# EAGLE board FlipDot_Controller (EAGLE 8.4.1)
FlipDot Controller Version 0.1 Prototype
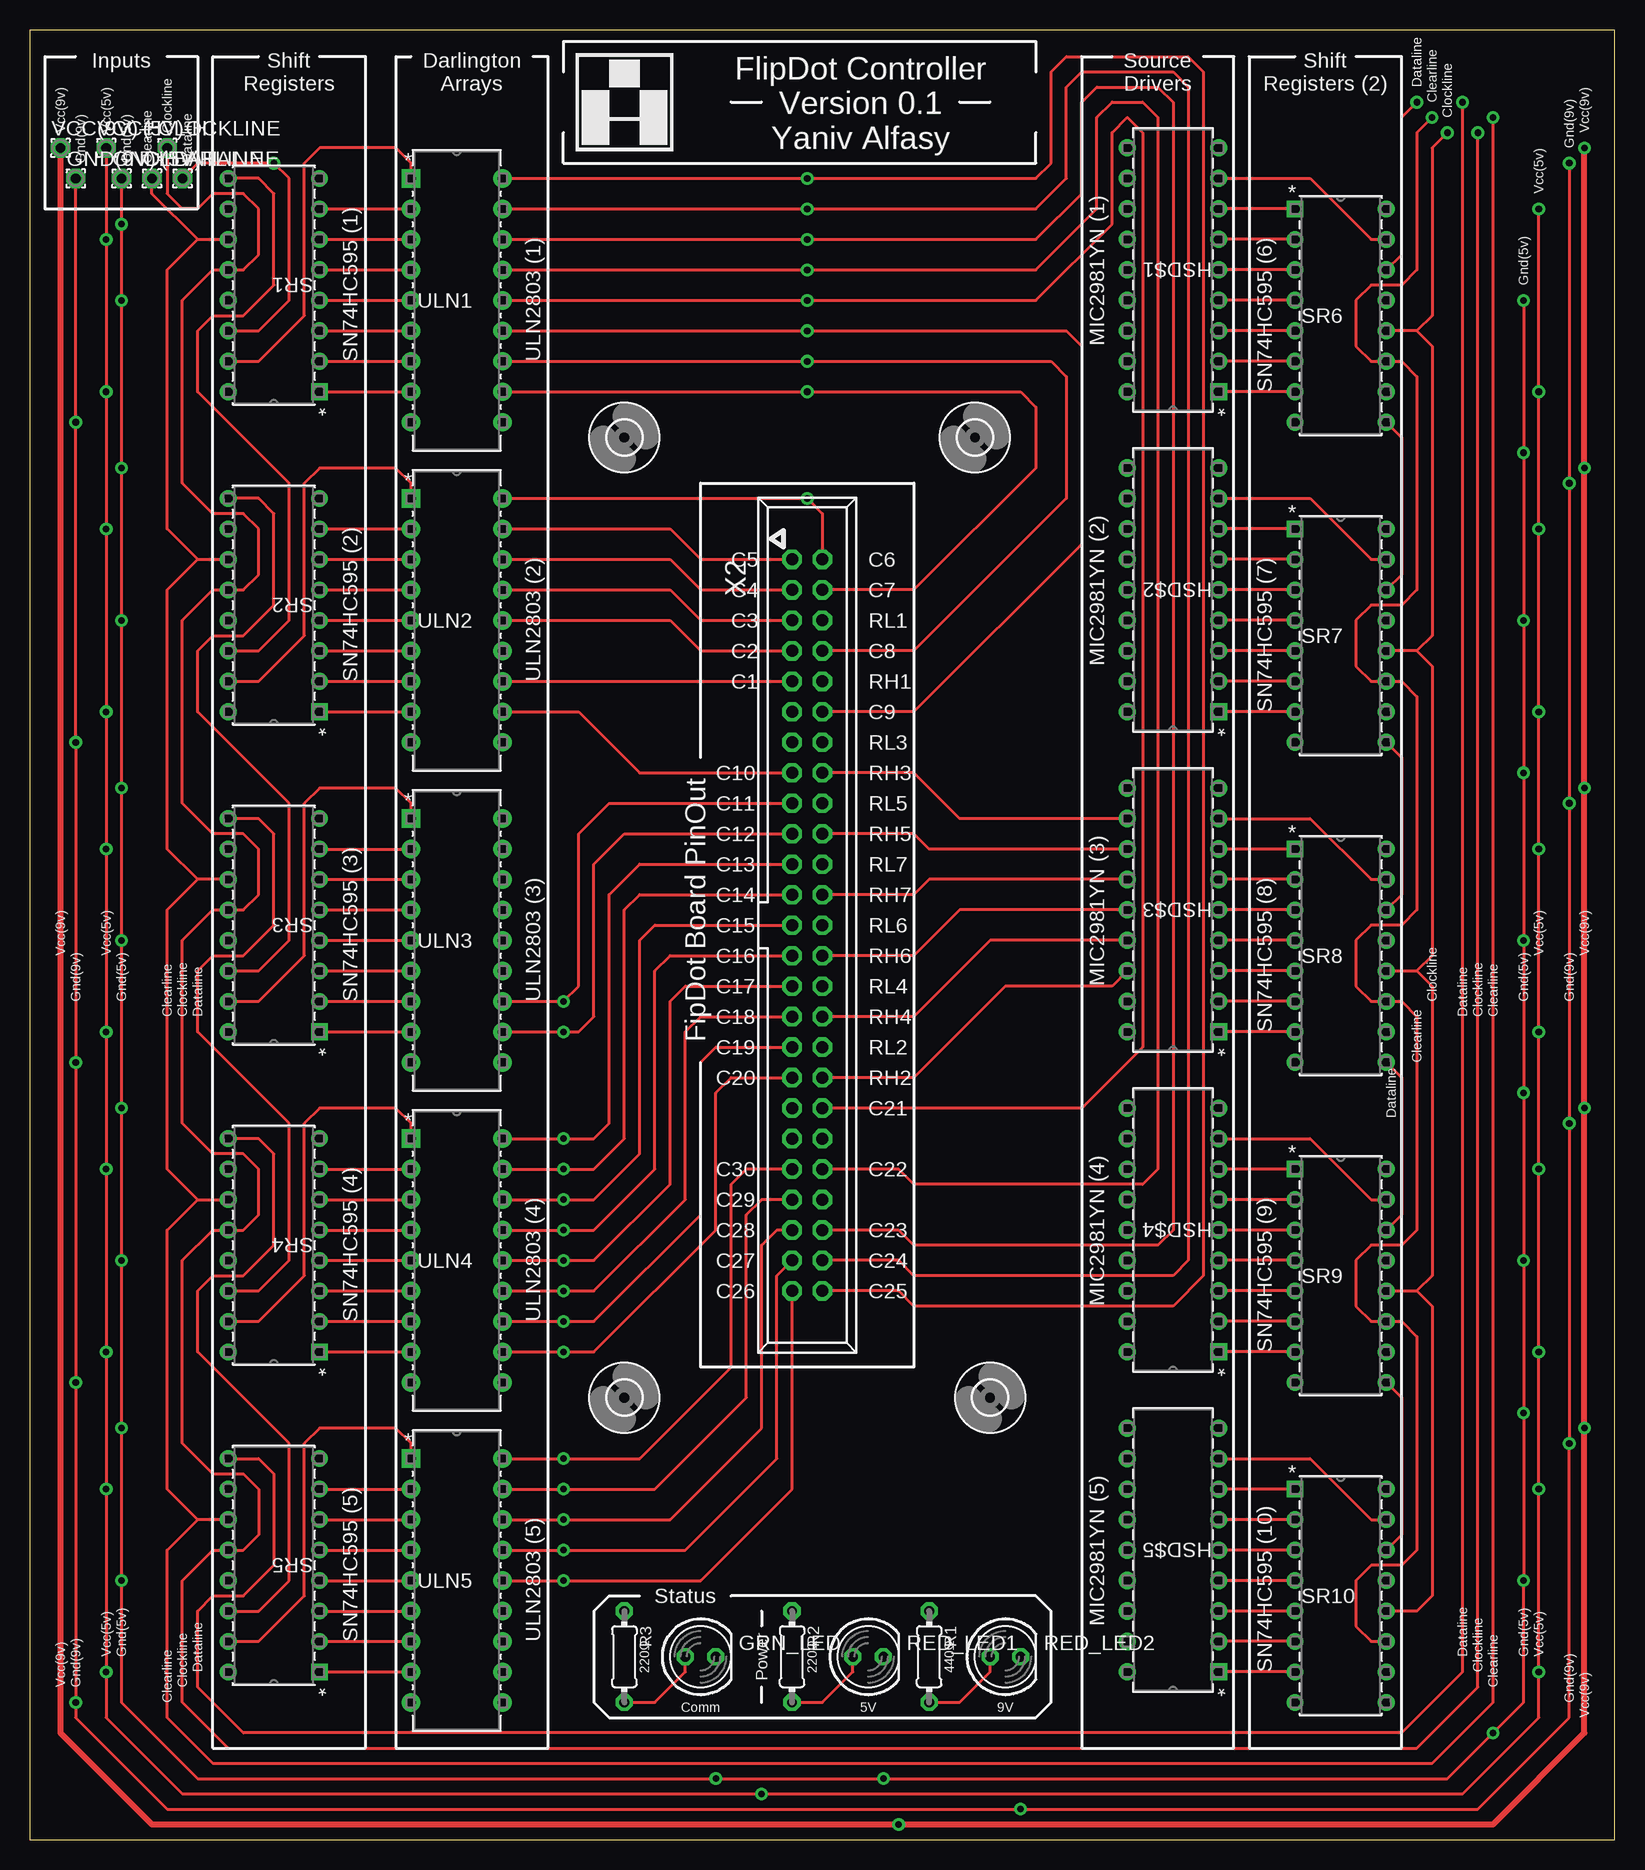
[diagram p0: board, top side]
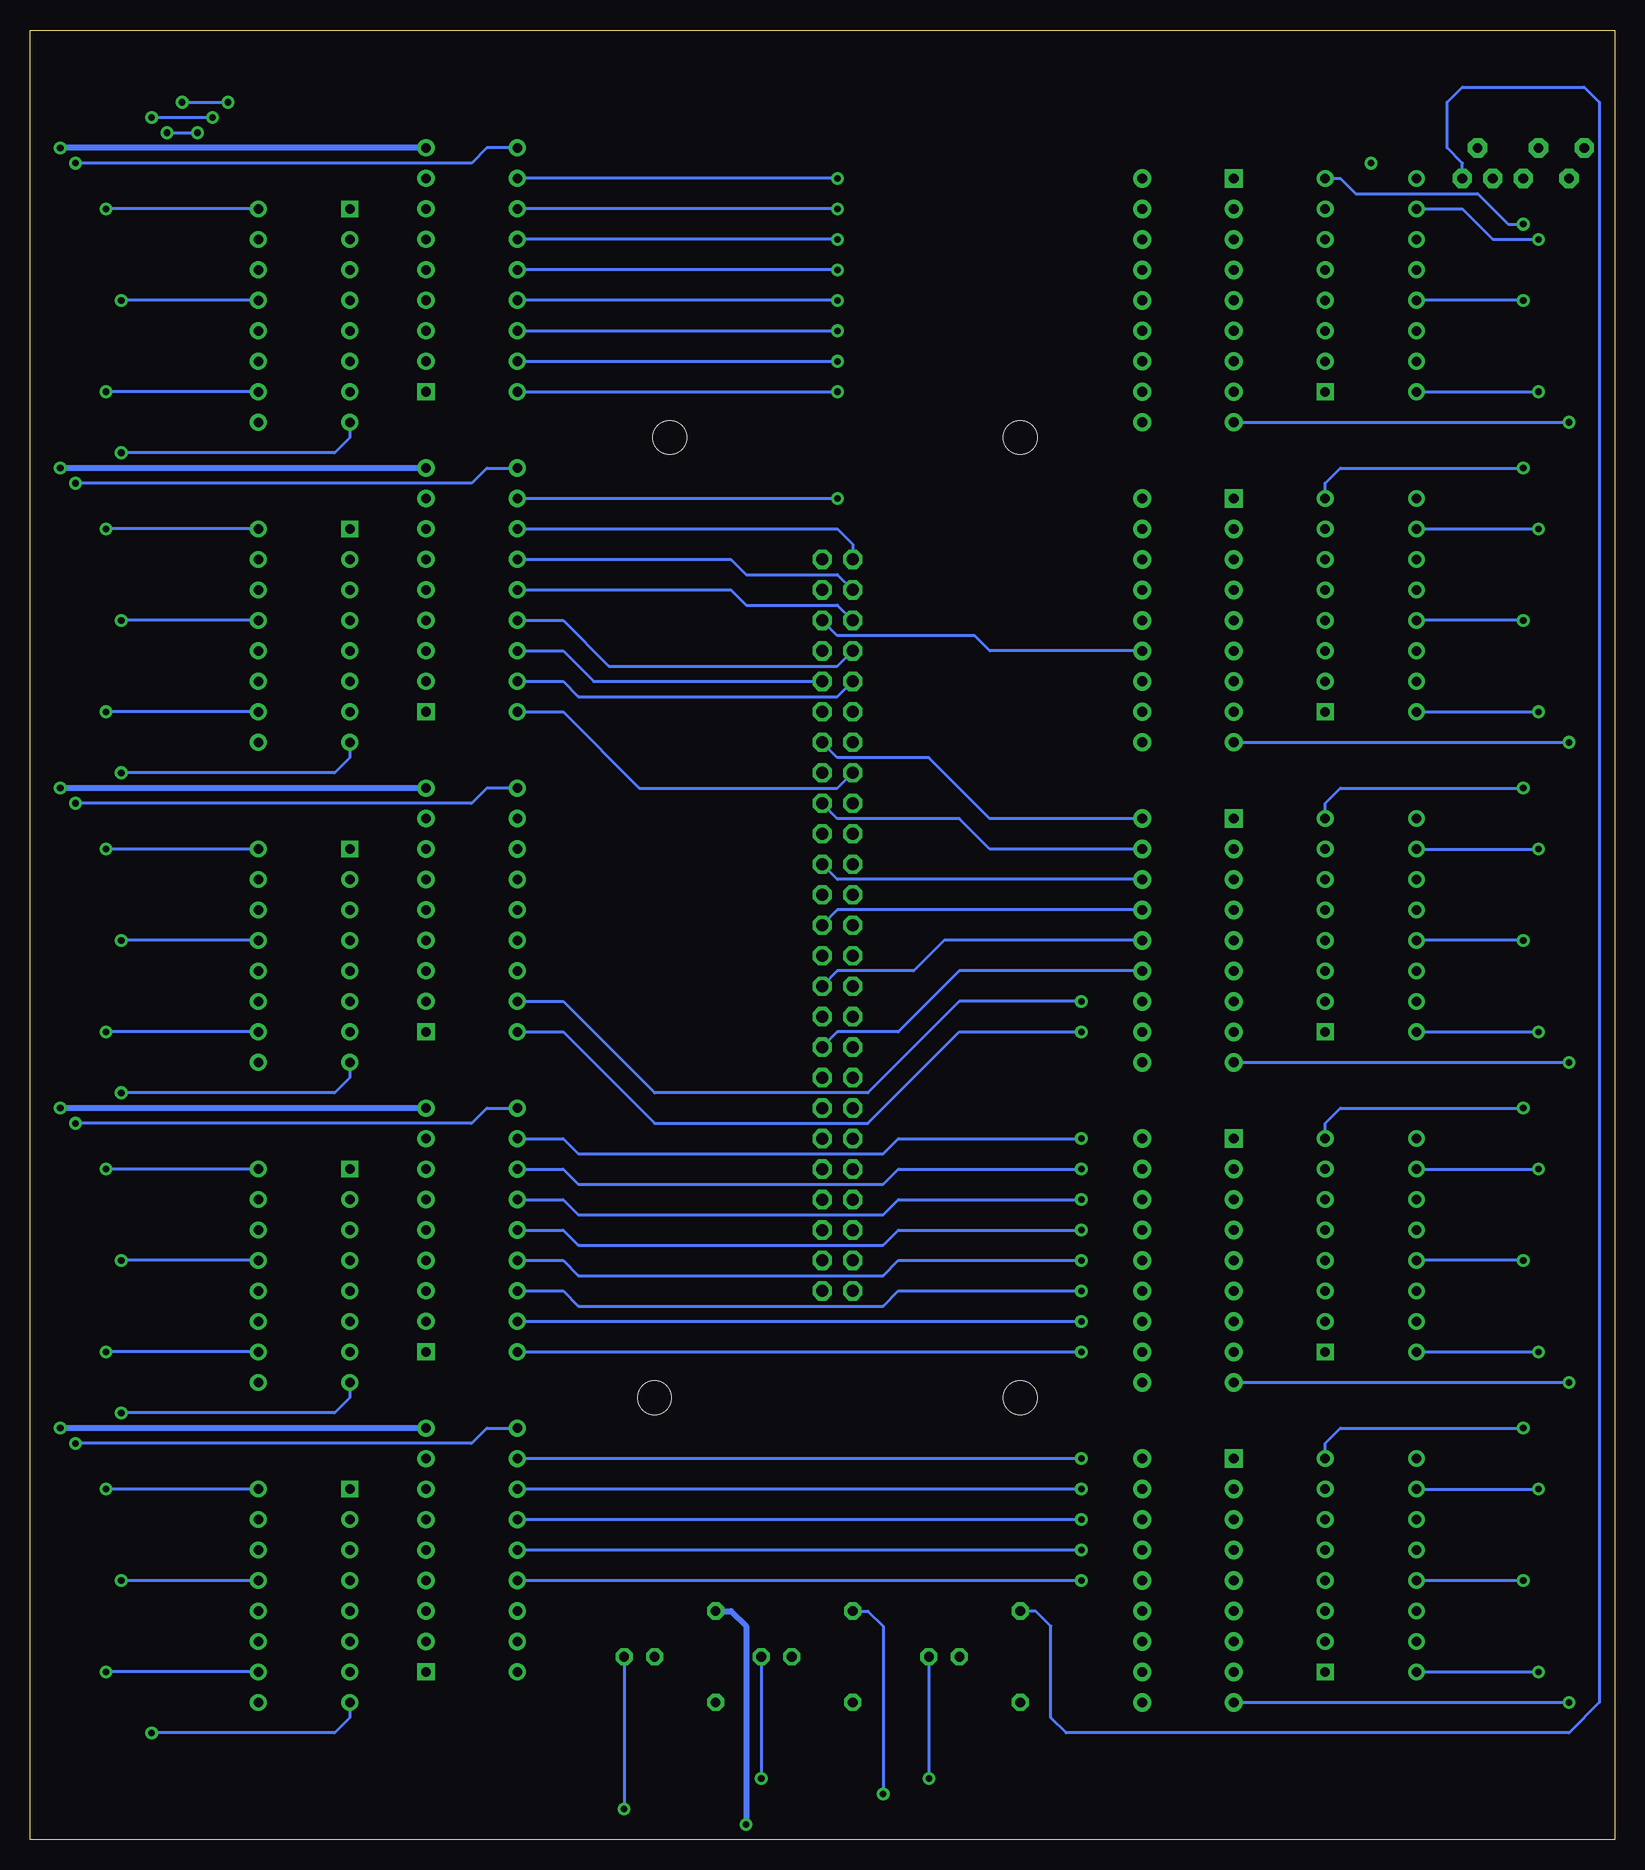
[diagram p1: board, bottom side, seen from below]

Size 132.06 x 150.8 mm. Coordinates in mm from the lower left corner, seen from the top.
Outline: 0,0 132.06,0 132.06,150.8 0,150.8 0,0
Copper layers (1*16): Top 0.035mm / dielectric 1.5mm / Bottom 0.035mm
Design rules "FlipDot_Controller": minimum track width 8mil, minimum drill 20mil, track to track 0.205mm, track to pad 0.205mm, pad to pad 0.205mm, via to via 0.205mm, smd to smd 8mil, copper to edge 8mil, drill to drill 8mil, minimum pad ring 12mil, minimum via ring 10mil, stop-mask expansion 4mil, vias tented up to drill 20mil, thermal gap 10mil
Net classes: 0 default: clearance 0.205 mm

## Footprints (pad centres in the part's own frame; a part is rotated, then mirrored left to right if it is on the bottom)
1,6/0,8 = drill 0.813 pad 1.6 octagon: 1 0,0
LED5MM = drill 0.813 octagon: A -1.27,0; K 1.27,0
2,8 = hole 2.8: 0,0
PDIP-18 = drill 0.813 pad 1.321 square: 1 -7.62,20.32 | drill 0.813 pad 1.321: 2 -7.62,17.78; 3 -7.62,15.24; 4 -7.62,12.7; 5 -7.62,10.16; 6 -7.62,7.62; 7 -7.62,5.08; 8 -7.62,2.54; 9 -7.62,0; 10 0,0; 11 0,2.54; 12 0,5.08; 13 0,7.62; 14 0,10.16; 15 0,12.7; 16 0,15.24; 17 0,17.78; 18 0,20.32
0204/7 = drill 0.813 octagon: 1 -3.81,0; 2 3.81,0
N16 = drill 0.787 pad 1.295 square: 1 -7.62,17.78 | drill 0.787 pad 1.295: 2 -7.62,15.24; 3 -7.62,12.7; 4 -7.62,10.16; 5 -7.62,7.62; 6 -7.62,5.08; 7 -7.62,2.54; 8 -7.62,0; 9 0,0; 10 0,2.54; 11 0,5.08; 12 0,7.62; 13 0,10.16; 14 0,12.7; 15 0,15.24; 16 0,17.78
DIP-18 = drill 0.813 pad 1.524 square: 1 -7.62,20.32 | drill 0.813 pad 1.524: 2 -7.62,17.78; 3 -7.62,15.24; 4 -7.62,12.7; 5 -7.62,10.16; 6 -7.62,7.62; 7 -7.62,5.08; 8 -7.62,2.54; 9 -7.62,0; 10 0,0; 11 0,2.54; 12 0,5.08; 13 0,7.62; 14 0,10.16; 15 0,12.7; 16 0,15.24; 17 0,17.78; 18 0,20.32
057-050-1 = drill 1 octagon: 1 -30.48,-1.27; 2 -30.48,1.27; 3 -27.94,-1.27; 4 -27.94,1.27; 5 -25.4,-1.27; 6 -25.4,1.27; 7 -22.86,-1.27; 8 -22.86,1.27; 9 -20.32,-1.27; 10 -20.32,1.27; 11 -17.78,-1.27; 12 -17.78,1.27; 13 -15.24,-1.27; 14 -15.24,1.27; 15 -12.7,-1.27; 16 -12.7,1.27; 17 -10.16,-1.27; 18 -10.16,1.27; 19 -7.62,-1.27; 20 -7.62,1.27; 21 -5.08,-1.27; 22 -5.08,1.27; 23 -2.54,-1.27; 24 -2.54,1.27; 25 0,-1.27; 26 0,1.27; 27 2.54,-1.27; 28 2.54,1.27; 29 5.08,-1.27; 30 5.08,1.27; 31 7.62,-1.27; 32 7.62,1.27; 33 10.16,-1.27; 34 10.16,1.27; 35 12.7,-1.27; 36 12.7,1.27; 37 15.24,-1.27; 38 15.24,1.27; 39 17.78,-1.27; 40 17.78,1.27; 41 20.32,-1.27; 42 20.32,1.27; 43 22.86,-1.27; 44 22.86,1.27; 45 25.4,-1.27; 46 25.4,1.27; 47 27.94,-1.27; 48 27.94,1.27; 49 30.48,-1.27; 50 30.48,1.27

## Placement (x,y rotation side)
CLEARLINE  [1,6/0,8]  10.16,138.43 0 top
CLOCKLINE  [1,6/0,8]  11.43,140.97 0 top
DATALINE  [1,6/0,8]  12.7,138.43 0 top
GND(5V)H  [1,6/0,8]  7.62,138.43 0 top
GND(9V)-H  [1,6/0,8]  3.81,138.43 0 top
GRN_LED  5MM 3.3  [LED5MM]  55.88,15.24 0 top
H1  MOUNT-HOLE2.8  [2,8]  49.53,116.84 0 top
H2  MOUNT-HOLE2.8  [2,8]  78.74,116.84 0 top
H3  MOUNT-HOLE2.8  [2,8]  80.01,36.83 0 top
H4  MOUNT-HOLE2.8  [2,8]  49.53,36.83 0 top
HSD$1  MIC2981YN  [PDIP-18]  91.44,140.97 180 top
HSD$2  MIC2981YN  [PDIP-18]  91.44,114.3 180 top
HSD$3  MIC2981YN  [PDIP-18]  91.44,87.63 180 top
HSD$4  MIC2981YN  [PDIP-18]  91.44,60.96 180 top
HSD$5  MIC2981YN  [PDIP-18]  91.44,34.29 180 top
R1  220OHM  [0204/7]  74.93,15.24 270 top
R2  220OHM  [0204/7]  63.5,15.24 270 top
R3  220OHM  [0204/7]  49.53,15.24 270 top
RED_LED1  5MM 2.2  [LED5MM]  69.85,15.24 0 top
RED_LED2  5MM 2.0  [LED5MM]  81.28,15.24 0 top
SR1  SN74HC595NE4  [N16]  16.51,138.43 180 top
SR2  SN74HC595NE4  [N16]  16.51,111.76 180 top
SR3  SN74HC595NE4  [N16]  16.51,85.09 180 top
SR4  SN74HC595NE4  [N16]  16.51,58.42 180 top
SR5  SN74HC595NE4  [N16]  16.51,31.75 180 top
SR6  SN74HC595NE4  [N16]  113.03,118.11 0 top
SR7  SN74HC595NE4  [N16]  113.03,91.44 0 top
SR8  SN74HC595NE4  [N16]  113.03,64.77 0 top
SR9  SN74HC595NE4  [N16]  113.03,38.1 0 top
SR10  SN74HC595NE4  [N16]  113.03,11.43 0 top
ULN1  ULN2803A  [DIP-18]  39.37,118.11 0 top
ULN2  ULN2803A  [DIP-18]  39.37,91.44 0 top
ULN3  ULN2803A  [DIP-18]  39.37,64.77 0 top
ULN4  ULN2803A  [DIP-18]  39.37,38.1 0 top
ULN5  ULN2803A  [DIP-18]  39.37,11.43 0 top
VCC(5V)-H  [1,6/0,8]  6.35,140.97 0 top
VCC(9V)-H  [1,6/0,8]  2.54,140.97 0 top
X2  057-050-1  [057-050-1]  64.77,76.2 270 top

## Library data of the parts
CLEARLINE CLOCKLINE GND(5V)H GND(9V)-H VCC(5V)-H VCC(9V)-H = wirepad
DATALINE = wirepad; SPICEPREFIX: X
GRN_LED RED_LED1 RED_LED2 = led
H1-H4 = holes
HSD$1-HSD$5 = FlipDot_Controller; MANUFACTURER_PART_NUMBER: MIC2981YN; VENDOR: MICREL
R1-R3 = resistor
SR1-SR10 = FlipDot_Controller; MANUFACTURER_PART_NUMBER: SN74HC595NE4; VENDOR: Vendor
ULN1-ULN5 = FlipDot_Controller; MANUFACTURER_PART_NUMBER: ULN2803A; VENDOR: ST Microelectronics
X2 = con-panduit; OC_FARNELL: unknown; OC_NEWARK: unknown

## Nets
+9V: HSD$1.9 HSD$2.9 HSD$3.9 HSD$4.9 HSD$5.9 R1.1 VCC(9V)-H.1
C$1: HSD$2.17 ULN2.12 X2.9
C$2: HSD$2.15 ULN2.14 X2.7
C$3: HSD$2.14 ULN2.15 X2.5
C$4: HSD$2.13 ULN2.16 X2.3
C$5: HSD$2.12 ULN2.17 X2.1
C$6: HSD$2.11 ULN2.18 X2.2
C$7: HSD$1.18 ULN1.11 X2.4
C$8: HSD$1.17 ULN1.12 X2.8
C$9: HSD$1.16 ULN1.13 X2.12
C$10: HSD$2.18 ULN2.11 X2.15
C$11: HSD$3.17 ULN3.12 X2.17
C$12: HSD$3.18 ULN3.11 X2.19
C$13: HSD$4.11 ULN4.18 X2.21
C$14: HSD$4.12 ULN4.17 X2.23
C$15: HSD$4.13 ULN4.16 X2.25
C$16: HSD$4.14 ULN4.15 X2.27
C$17: HSD$4.15 ULN4.14 X2.29
C$18: HSD$4.16 ULN4.13 X2.31
C$19: HSD$4.17 ULN4.12 X2.33
C$20: HSD$4.18 ULN4.11 X2.35
C$21: HSD$1.15 ULN1.14 X2.38
C$22: HSD$1.14 ULN1.15 X2.42
C$23: HSD$1.13 ULN1.16 X2.46
C$24: HSD$1.12 ULN1.17 X2.48
C$25: HSD$1.11 ULN1.18 X2.50
C$26: HSD$5.15 ULN5.14 X2.49
C$27: HSD$5.14 ULN5.15 X2.47
C$28: HSD$5.13 ULN5.16 X2.45
C$29: HSD$5.12 ULN5.17 X2.43
C$30: HSD$5.11 ULN5.18 X2.41
CLEARLINE: CLEARLINE.1 SR1.11 SR2.11 SR3.11 SR4.11 SR5.11 SR6.11 SR7.11 SR8.11 SR9.11 SR10.11
CLOCKLINE: CLOCKLINE.1 SR1.12 SR2.12 SR3.12 SR4.12 SR5.12 SR6.12 SR7.12 SR8.12 SR9.12 SR10.12
DATALINE: DATALINE.1 R3.1 SR1.14
GND(5V): GND(5V)H.1 GRN_LED.K RED_LED1.K SR1.8 SR1.13 SR2.8 SR2.13 SR3.8 SR3.13 SR4.8 SR4.13 SR5.8 SR5.13 SR6.8 SR6.13 SR7.8 SR7.13 SR8.8 SR8.13 SR9.8 SR9.13 SR10.8 SR10.13
GND(9V): GND(9V)-H.1 HSD$1.10 HSD$2.10 HSD$3.10 HSD$4.10 HSD$5.10 RED_LED2.K ULN1.9 ULN2.9 ULN3.9 ULN4.9 ULN5.9
N$1: SR1.15 ULN1.1
N$2: SR1.1 ULN1.8
N$3: SR1.2 ULN1.7
N$4: SR1.3 ULN1.6
N$5: SR1.4 ULN1.5
N$6: SR1.5 ULN1.4
N$7: SR1.6 ULN1.3
N$8: SR1.9 SR2.14
N$9: SR1.7 ULN1.2
N$10: SR6.9 SR7.14
N$11: SR7.9 SR8.14
N$12: SR8.9 SR9.14
N$13: SR2.15 ULN2.1
N$14: SR2.9 SR3.14
N$15: SR4.15 ULN4.1
N$16: SR2.7 ULN2.2
N$17: SR2.6 ULN2.3
N$18: SR2.5 ULN2.4
N$19: SR2.4 ULN2.5
N$20: SR2.3 ULN2.6
N$21: SR2.2 ULN2.7
N$22: SR3.15 ULN3.1
N$23: SR3.9 SR4.14
N$24: SR4.9 SR5.14
N$25: SR5.15 ULN5.1
N$26: SR4.7 ULN4.2
N$27: SR3.7 ULN3.2
N$28: SR3.6 ULN3.3
N$29: SR3.5 ULN3.4
N$30: SR3.4 ULN3.5
N$31: SR3.3 ULN3.6
N$32: SR3.2 ULN3.7
N$33: HSD$1.8 SR6.15
N$34: SR5.7 ULN5.2
N$35: HSD$1.7 SR6.1
N$36: HSD$1.6 SR6.2
N$37: SR4.6 ULN4.3
N$38: SR4.5 ULN4.4
N$39: SR4.4 ULN4.5
N$40: SR4.3 ULN4.6
N$41: SR4.2 ULN4.7
N$42: SR4.1 ULN4.8
N$43: SR5.6 ULN5.3
N$44: HSD$1.5 SR6.3
N$45: HSD$1.4 SR6.4
N$46: SR5.5 ULN5.4
N$47: SR5.4 ULN5.5
N$48: SR5.3 ULN5.6
N$49: SR5.2 ULN5.7
N$50: SR5.1 ULN5.8
N$51: HSD$1.3 SR6.5
N$52: HSD$1.2 SR6.6
N$53: HSD$1.1 SR6.7
N$54: SR9.9 SR10.14
N$55: HSD$2.8 SR7.15
N$56: HSD$3.8 SR8.15
N$57: HSD$4.8 SR9.15
N$58: HSD$5.8 SR10.15
N$59: HSD$2.7 SR7.1
N$60: HSD$2.6 SR7.2
N$61: HSD$2.5 SR7.3
N$62: HSD$2.4 SR7.4
N$63: HSD$2.3 SR7.5
N$64: HSD$2.2 SR7.6
N$65: HSD$2.1 SR7.7
N$66: HSD$3.7 SR8.1
N$67: HSD$3.6 SR8.2
N$68: HSD$3.5 SR8.3
N$69: HSD$3.4 SR8.4
N$70: HSD$3.3 SR8.5
N$71: HSD$3.2 SR8.6
N$72: HSD$3.1 SR8.7
N$73: HSD$4.7 SR9.1
N$74: HSD$4.6 SR9.2
N$75: HSD$4.5 SR9.3
N$76: HSD$4.4 SR9.4
N$77: HSD$4.3 SR9.5
N$78: HSD$4.2 SR9.6
N$79: HSD$4.1 SR9.7
N$80: HSD$5.7 SR10.1
N$81: HSD$5.6 SR10.2
N$82: HSD$5.5 SR10.3
N$83: HSD$5.4 SR10.4
N$84: HSD$5.3 SR10.5
N$85: HSD$5.2 SR10.6
N$86: HSD$5.1 SR10.7
N$89: SR2.1 ULN2.8
N$90: SR3.1 ULN3.8
N$95: R2.2 RED_LED1.A
N$96: R1.2 RED_LED2.A
N$98: GRN_LED.A R3.2
NA$1: X2.40
NA$2: X2.44
NA$3: X2.11
NA$4: X2.13
NA$5: X2.37
NA$6: X2.39
RH$1: HSD$2.16 X2.10
RH$2: HSD$3.16 X2.36
RH$3: HSD$3.11 X2.16
RH$4: HSD$3.15 X2.32
RH$5: HSD$3.12 X2.20
RH$6: HSD$3.14 X2.28
RH$7: HSD$3.13 X2.24
RL$1: ULN2.13 X2.6
RL$2: ULN3.13 X2.34
RL$3: ULN3.18 X2.14
RL$4: ULN3.14 X2.30
RL$5: ULN3.17 X2.18
RL$6: ULN3.15 X2.26
RL$7: ULN3.16 X2.22
SCONNECT$1: SR5.9 SR6.14
VCC(5V): R2.1 SR1.10 SR1.16 SR2.10 SR2.16 SR3.10 SR3.16 SR4.10 SR4.16 SR5.10 SR5.16 SR6.10 SR6.16 SR7.10 SR7.16 SR8.10 SR8.16 SR9.10 SR9.16 SR10.10 SR10.16 VCC(5V)-H.1

## Tracks (layer width: path | path; a pad name or v marks a point on that pad's centre or on a via)
+9V  (via drill 0.55)
  Top 0.508: v129.54,140.97 v129.54,114.3 v129.54,87.63 v129.54,60.96 v129.54,34.29 129.54,8.89 121.92,1.27 v72.39,1.27 10.16,1.27 2.54,8.89 VCC(9V)-H.1
  Bottom 0.508: HSD$1.9 v129.54,140.97 | HSD$2.9 v129.54,114.3 | HSD$3.9 v129.54,87.63 | HSD$4.9 v129.54,60.96 | HSD$5.9 v129.54,34.29 | R1.1 73.66,19.05 72.39,17.78 v72.39,1.27
C$1
  Top 0.254: ULN2.12 X2.9
  Bottom 0.254: HSD$2.17 87.63,96.52 86.36,95.25 64.77,95.25 X2.9
C$2
  Top 0.254: ULN2.14 53.34,101.6 55.88,99.06 X2.7
  Bottom 0.254: HSD$2.15 87.63,101.6 83.82,97.79 64.77,97.79 X2.7
C$3
  Top 0.254: ULN2.15 53.34,104.14 55.88,101.6 X2.5
  Bottom 0.254: HSD$2.14 73.66,104.14 72.39,102.87 64.77,102.87 X2.5
C$4
  Top 0.254: ULN2.16 53.34,106.68 55.88,104.14 X2.3
  Bottom 0.254: HSD$2.13 73.66,106.68 72.39,105.41 64.77,105.41 X2.3
C$5
  Top 0.254: ULN2.17 53.34,109.22 55.88,106.68 X2.1
  Bottom 0.254: HSD$2.12 64.77,109.22 63.5,107.95 X2.1
C$6  (via drill 0.55 pad 0.55)
  Top 0.254: ULN2.18 v64.77,111.76 66.04,110.49 X2.2
  Bottom 0.254: HSD$2.11 v64.77,111.76
C$7  (via drill 0.55 pad 0.55)
  Top 0.254: ULN1.11 v64.77,120.65 82.55,120.65 83.82,119.38 83.82,114.3 73.66,104.14 X2.4
  Bottom 0.254: HSD$1.18 v64.77,120.65
C$8  (via drill 0.55 pad 0.55)
  Top 0.254: ULN1.12 v64.77,123.19 85.09,123.19 86.36,121.92 86.36,111.76 73.66,99.06 X2.8
  Bottom 0.254: HSD$1.17 v64.77,123.19
C$9  (via drill 0.55 pad 0.55)
  Top 0.254: ULN1.13 v64.77,125.73 86.36,125.73 87.63,124.46 87.63,107.95 73.66,93.98 X2.12
  Bottom 0.254: HSD$1.16 v64.77,125.73
C$10
  Top 0.254: ULN2.11 45.72,93.98 50.8,88.9 X2.15
  Bottom 0.254: HSD$2.18 87.63,93.98 81.28,87.63 64.77,87.63 X2.15
C$11  (via drill 0.55 pad 0.55)
  Top 0.254: ULN3.12 v44.45,69.85 45.72,71.12 45.72,83.82 48.26,86.36 X2.17
  Bottom 0.254: HSD$3.17 87.63,69.85 80.01,62.23 62.23,62.23 54.61,69.85 v44.45,69.85
C$12  (via drill 0.55 pad 0.55)
  Top 0.254: ULN3.11 v44.45,67.31 45.72,67.31 46.99,68.58 46.99,81.28 49.53,83.82 X2.19
  Bottom 0.254: HSD$3.18 87.63,67.31 80.01,59.69 62.23,59.69 54.61,67.31 v44.45,67.31
C$13  (via drill 0.55 pad 0.55)
  Top 0.254: ULN4.18 v44.45,58.42 46.99,58.42 48.26,59.69 48.26,78.74 50.8,81.28 X2.21
  Bottom 0.254: HSD$4.11 87.63,58.42 86.36,57.15 60.96,57.15 59.69,58.42 v44.45,58.42
C$14  (via drill 0.55 pad 0.55)
  Top 0.254: ULN4.17 v44.45,55.88 46.99,55.88 49.53,58.42 49.53,77.47 50.8,78.74 X2.23
  Bottom 0.254: HSD$4.12 87.63,55.88 86.36,54.61 60.96,54.61 59.69,55.88 v44.45,55.88
C$15  (via drill 0.55 pad 0.55)
  Top 0.254: ULN4.16 v44.45,53.34 46.99,53.34 50.8,57.15 50.8,74.93 52.07,76.2 X2.25
  Bottom 0.254: HSD$4.13 87.63,53.34 86.36,52.07 60.96,52.07 59.69,53.34 v44.45,53.34
C$16  (via drill 0.55 pad 0.55)
  Top 0.254: ULN4.15 v44.45,50.8 46.99,50.8 52.07,55.88 52.07,72.39 53.34,73.66 X2.27
  Bottom 0.254: HSD$4.14 87.63,50.8 86.36,49.53 60.96,49.53 59.69,50.8 v44.45,50.8
C$17  (via drill 0.55 pad 0.55)
  Top 0.254: ULN4.14 v44.45,48.26 46.99,48.26 53.34,54.61 53.34,69.85 54.61,71.12 X2.29
  Bottom 0.254: HSD$4.15 87.63,48.26 86.36,46.99 60.96,46.99 59.69,48.26 v44.45,48.26
C$18  (via drill 0.55 pad 0.55)
  Top 0.254: ULN4.13 v44.45,45.72 46.99,45.72 54.61,53.34 54.61,67.31 55.88,68.58 X2.31
  Bottom 0.254: HSD$4.16 87.63,45.72 86.36,44.45 60.96,44.45 59.69,45.72 v44.45,45.72
C$19  (via drill 0.55 pad 0.55)
  Top 0.254: ULN4.12 v44.45,43.18 46.99,43.18 55.88,52.07 55.88,64.77 57.15,66.04 X2.33
  Bottom 0.254: HSD$4.17 v44.45,43.18
C$20  (via drill 0.55 pad 0.55)
  Top 0.254: ULN4.11 v44.45,40.64 46.99,40.64 57.15,50.8 57.15,62.23 58.42,63.5 X2.35
  Bottom 0.254: HSD$4.18 v44.45,40.64
C$21  (via drill 0.55 pad 0.55)
  Top 0.254: ULN1.14 v64.77,128.27 83.82,128.27 90.17,134.62 90.17,142.24 91.44,143.51 92.71,142.24 92.71,66.04 87.63,60.96 X2.38
  Bottom 0.254: v64.77,128.27 HSD$1.15
C$22  (via drill 0.55 pad 0.55)
  Top 0.254: ULN1.15 v64.77,130.81 83.82,130.81 88.9,135.89 88.9,143.51 90.17,144.78 92.71,144.78 93.98,143.51 93.98,55.88 92.71,54.61 73.66,54.61 72.39,55.88 X2.42
  Bottom 0.254: v64.77,130.81 HSD$1.14
C$23  (via drill 0.55 pad 0.55)
  Top 0.254: ULN1.16 v64.77,133.35 83.82,133.35 87.63,137.16 87.63,144.78 88.9,146.05 93.98,146.05 95.25,144.78 95.25,50.8 93.98,49.53 73.66,49.53 72.39,50.8 X2.46
  Bottom 0.254: v64.77,133.35 HSD$1.13
C$24  (via drill 0.55 pad 0.55)
  Top 0.254: ULN1.17 v64.77,135.89 83.82,135.89 86.36,138.43 86.36,146.05 87.63,147.32 95.25,147.32 96.52,146.05 96.52,48.26 95.25,46.99 73.66,46.99 72.39,48.26 X2.48
  Bottom 0.254: v64.77,135.89 HSD$1.12
C$25  (via drill 0.55 pad 0.55)
  Top 0.254: ULN1.18 v64.77,138.43 83.82,138.43 85.09,139.7 85.09,147.32 86.36,148.59 96.52,148.59 97.79,147.32 97.79,46.99 95.25,44.45 73.66,44.45 72.39,45.72 X2.50
  Bottom 0.254: v64.77,138.43 HSD$1.11
C$26  (via drill 0.55 pad 0.55)
  Top 0.254: ULN5.14 v44.45,21.59 55.88,21.59 63.5,29.21 X2.49
  Bottom 0.254: v44.45,21.59 HSD$5.15
C$27  (via drill 0.55 pad 0.55)
  Top 0.254: ULN5.15 v44.45,24.13 54.61,24.13 62.23,31.75 62.23,46.99 X2.47
  Bottom 0.254: v44.45,24.13 HSD$5.14
C$28  (via drill 0.55 pad 0.55)
  Top 0.254: ULN5.16 v44.45,26.67 53.34,26.67 60.96,34.29 60.96,49.53 62.23,50.8 X2.45
  Bottom 0.254: v44.45,26.67 HSD$5.13
C$29  (via drill 0.55 pad 0.55)
  Top 0.254: ULN5.17 v44.45,29.21 52.07,29.21 59.69,36.83 59.69,52.07 60.96,53.34 X2.43
  Bottom 0.254: v44.45,29.21 HSD$5.12
C$30  (via drill 0.55 pad 0.55)
  Top 0.254: ULN5.18 v44.45,31.75 50.8,31.75 58.42,39.37 58.42,54.61 59.69,55.88 X2.41
  Bottom 0.254: v44.45,31.75 HSD$5.11
CLEARLINE  (via drill 0.55)
  Top 0.254: SR10.11 111.76,16.51 110.49,17.78 110.49,21.59 111.76,22.86 114.3,22.86 115.57,24.13 115.57,41.91 114.3,43.18 SR9.11 111.76,43.18 110.49,44.45 110.49,48.26 111.76,49.53 114.3,49.53 115.57,50.8 115.57,68.58 114.3,69.85 SR8.11 111.76,69.85 110.49,71.12 110.49,74.93 111.76,76.2 114.3,76.2 115.57,77.47 115.57,95.25 114.3,96.52 SR7.11 111.76,96.52 110.49,97.79 110.49,101.6 111.76,102.87 114.3,102.87 115.57,104.14 115.57,121.92 114.3,123.19 SR6.11 111.76,123.19 110.49,124.46 110.49,128.27 111.76,129.54 114.3,129.54 115.57,130.81 115.57,142.24 v116.84,143.51 | v121.92,143.51 121.92,11.43 116.84,6.35 15.24,6.35 11.43,10.16 11.43,24.13 13.97,26.67 | SR5.11 13.97,26.67 | 13.97,26.67 11.43,29.21 11.43,50.8 13.97,53.34 | 13.97,80.01 11.43,82.55 11.43,104.14 13.97,106.68 | SR3.11 13.97,80.01 | 13.97,80.01 11.43,77.47 11.43,55.88 13.97,53.34 | 13.97,53.34 SR4.11 | 13.97,106.68 SR2.11 | 13.97,106.68 11.43,109.22 11.43,130.81 13.97,133.35 | 13.97,133.35 SR1.11 | CLEARLINE.1 10.16,137.16 13.97,133.35
  Bottom 0.254: v121.92,143.51 v116.84,143.51
CLOCKLINE  (via drill 0.55)
  Top 0.254: SR8.12 115.57,72.39 | SR9.12 115.57,45.72 | SR10.12 115.57,19.05 116.84,20.32 116.84,44.45 115.57,45.72 | v120.65,142.24 120.65,12.7 115.57,7.62 16.51,7.62 12.7,11.43 12.7,21.59 15.24,24.13 SR5.12 17.78,24.13 19.05,25.4 19.05,29.21 17.78,30.48 15.24,30.48 12.7,33.02 12.7,48.26 15.24,50.8 SR4.12 17.78,50.8 19.05,52.07 19.05,55.88 17.78,57.15 15.24,57.15 12.7,59.69 12.7,74.93 15.24,77.47 SR3.12 17.78,77.47 19.05,78.74 19.05,82.55 17.78,83.82 15.24,83.82 12.7,86.36 12.7,101.6 15.24,104.14 SR2.12 17.78,104.14 19.05,105.41 19.05,109.22 17.78,110.49 15.24,110.49 12.7,113.03 12.7,128.27 15.24,130.81 SR1.12 17.78,130.81 19.05,132.08 19.05,135.89 17.78,137.16 15.24,137.16 13.97,135.89 12.7,135.89 11.43,137.16 CLOCKLINE.1 | v118.11,142.24 116.84,140.97 116.84,127 115.57,125.73 | 115.57,125.73 SR6.12 | 115.57,125.73 116.84,124.46 116.84,100.33 115.57,99.06 | 115.57,99.06 SR7.12 | 115.57,99.06 116.84,97.79 116.84,73.66 115.57,72.39 | 115.57,72.39 116.84,71.12 116.84,46.99 115.57,45.72
  Bottom 0.254: v120.65,142.24 v118.11,142.24
DATALINE  (via drill 0.55)
  Top 0.254: SR1.14 19.05,125.73 21.59,128.27 21.59,138.43 v20.32,139.7 13.97,139.7 DATALINE.1
  Bottom 0.254: DATALINE.1 12.7,139.7 13.97,140.97 13.97,144.78 12.7,146.05 2.54,146.05 1.27,144.78 1.27,11.43 3.81,8.89 45.72,8.89 46.99,10.16 46.99,17.78 48.26,19.05 R3.1
GND(5V)  (via drill 0.55)
  Top 0.254: v124.46,128.27 v124.46,115.57 v124.46,101.6 v124.46,88.9 v124.46,74.93 v124.46,62.23 v124.46,48.26 v124.46,35.56 v124.46,21.59 124.46,11.43 v121.92,8.89 118.11,5.08 v71.12,5.08 v57.15,5.08 13.97,5.08 7.62,11.43 v7.62,21.59 v7.62,34.29 v7.62,48.26 v7.62,60.96 v7.62,74.93 v7.62,87.63 v7.62,101.6 v7.62,114.3 v7.62,128.27 v7.62,134.62 GND(5V)H.1
  Bottom 0.254: SR6.13 v124.46,128.27 | SR7.13 v124.46,101.6 | SR8.13 v124.46,74.93 | SR9.13 v124.46,48.26 | SR10.13 v124.46,21.59 | SR6.8 105.41,116.84 106.68,115.57 v124.46,115.57 | SR10.8 105.41,10.16 106.68,8.89 v121.92,8.89 | SR7.8 105.41,90.17 106.68,88.9 v124.46,88.9 | SR8.8 105.41,63.5 106.68,62.23 v124.46,62.23 | SR9.8 105.41,36.83 106.68,35.56 v124.46,35.56 | v7.62,128.27 SR1.13 | v7.62,101.6 SR2.13 | v7.62,74.93 SR3.13 | v7.62,48.26 SR4.13 | v7.62,21.59 SR5.13 | SR1.8 22.86,138.43 21.59,137.16 11.43,137.16 8.89,134.62 v7.62,134.62 | SR3.8 24.13,86.36 22.86,87.63 v7.62,87.63 | SR2.8 24.13,113.03 22.86,114.3 v7.62,114.3 | SR5.8 24.13,33.02 22.86,34.29 v7.62,34.29 | SR4.8 24.13,59.69 22.86,60.96 v7.62,60.96 | GRN_LED.K v57.15,5.08 | RED_LED1.K v71.12,5.08
GND(9V)  (via drill 0.55)
  Top 0.254: v128.27,139.7 v128.27,113.03 v128.27,86.36 v128.27,59.69 v128.27,33.02 128.27,10.16 120.65,2.54 v82.55,2.54 11.43,2.54 3.81,10.16 v3.81,11.43 v3.81,38.1 v3.81,64.77 v3.81,91.44 v3.81,118.11 GND(9V)-H.1
  Bottom 0.254: v128.27,139.7 95.25,139.7 93.98,140.97 HSD$1.10 | ULN1.9 v3.81,118.11 | ULN2.9 v3.81,91.44 | ULN3.9 v3.81,64.77 | ULN4.9 v3.81,38.1 | ULN5.9 v3.81,11.43 | HSD$2.10 93.98,114.3 95.25,113.03 v128.27,113.03 | HSD$3.10 93.98,87.63 95.25,86.36 v128.27,86.36 | HSD$4.10 93.98,60.96 95.25,59.69 v128.27,59.69 | HSD$5.10 93.98,34.29 95.25,33.02 v128.27,33.02 | RED_LED2.K v82.55,2.54
N$1
  Top 0.254: SR1.15 19.05,123.19 22.86,127 22.86,139.7 24.13,140.97 30.48,140.97 31.75,139.7 ULN1.1
N$2
  Top 0.254: SR1.1 ULN1.8
N$3
  Top 0.254: SR1.2 ULN1.7
N$4
  Top 0.254: SR1.3 ULN1.6
N$5
  Top 0.254: SR1.4 ULN1.5
N$6
  Top 0.254: SR1.5 ULN1.4
N$7
  Top 0.254: SR1.6 ULN1.3
N$8
  Top 0.254: SR2.14 19.05,99.06 21.59,101.6 21.59,113.03 13.97,120.65 13.97,125.73 15.24,127 17.78,127 20.32,129.54 20.32,137.16 19.05,138.43 SR1.9
N$9
  Top 0.254: SR1.7 ULN1.2
N$10
  Top 0.254: SR6.9 114.3,116.84 114.3,105.41 SR7.14
N$11
  Top 0.254: SR7.9 114.3,90.17 114.3,78.74 SR8.14
N$12
  Top 0.254: SR8.9 114.3,63.5 114.3,52.07 SR9.14
N$13
  Top 0.254: SR2.15 19.05,96.52 22.86,100.33 22.86,113.03 24.13,114.3 30.48,114.3 31.75,113.03 ULN2.1
N$14
  Top 0.254: SR3.14 19.05,72.39 21.59,74.93 21.59,86.36 13.97,93.98 13.97,99.06 15.24,100.33 17.78,100.33 20.32,102.87 20.32,110.49 19.05,111.76 SR2.9
N$15
  Top 0.254: SR4.15 19.05,43.18 22.86,46.99 22.86,59.69 24.13,60.96 30.48,60.96 31.75,59.69 ULN4.1
N$16
  Top 0.254: SR2.7 ULN2.2
N$17
  Top 0.254: SR2.6 ULN2.3
N$18
  Top 0.254: SR2.5 ULN2.4
N$19
  Top 0.254: SR2.4 ULN2.5
N$20
  Top 0.254: SR2.3 ULN2.6
N$21
  Top 0.254: SR2.2 ULN2.7
N$22
  Top 0.254: SR3.15 19.05,69.85 22.86,73.66 22.86,86.36 24.13,87.63 30.48,87.63 31.75,86.36 ULN3.1
N$23
  Top 0.254: SR4.14 19.05,45.72 21.59,48.26 21.59,59.69 13.97,67.31 13.97,72.39 15.24,73.66 17.78,73.66 20.32,76.2 20.32,83.82 19.05,85.09 SR3.9
N$24
  Top 0.254: SR5.14 19.05,19.05 21.59,21.59 21.59,33.02 13.97,40.64 13.97,45.72 15.24,46.99 17.78,46.99 20.32,49.53 20.32,57.15 19.05,58.42 SR4.9
N$25
  Top 0.254: SR5.15 19.05,16.51 22.86,20.32 22.86,33.02 24.13,34.29 30.48,34.29 31.75,33.02 ULN5.1
N$26
  Top 0.254: SR4.7 ULN4.2
N$27
  Top 0.254: SR3.7 ULN3.2
N$28
  Top 0.254: SR3.6 ULN3.3
N$29
  Top 0.254: SR3.5 ULN3.4
N$30
  Top 0.254: SR3.4 ULN3.5
N$31
  Top 0.254: SR3.3 ULN3.6
N$32
  Top 0.254: SR3.2 ULN3.7
N$33
  Top 0.254: HSD$1.8 106.68,138.43 111.76,133.35 SR6.15
N$34
  Top 0.254: SR5.7 ULN5.2
N$35
  Top 0.254: SR6.1 HSD$1.7
N$36
  Top 0.254: SR6.2 HSD$1.6
N$37
  Top 0.254: SR4.6 ULN4.3
N$38
  Top 0.254: SR4.5 ULN4.4
N$39
  Top 0.254: SR4.4 ULN4.5
N$40
  Top 0.254: SR4.3 ULN4.6
N$41
  Top 0.254: SR4.2 ULN4.7
N$42
  Top 0.254: SR4.1 ULN4.8
N$43
  Top 0.254: SR5.6 ULN5.3
N$44
  Top 0.254: SR6.3 HSD$1.5
N$45
  Top 0.254: SR6.4 HSD$1.4
N$46
  Top 0.254: SR5.5 ULN5.4
N$47
  Top 0.254: SR5.4 ULN5.5
N$48
  Top 0.254: SR5.3 ULN5.6
N$49
  Top 0.254: SR5.2 ULN5.7
N$50
  Top 0.254: SR5.1 ULN5.8
N$51
  Top 0.254: SR6.5 HSD$1.3
N$52
  Top 0.254: SR6.6 HSD$1.2
N$53
  Top 0.254: SR6.7 HSD$1.1
N$54
  Top 0.254: SR9.9 114.3,36.83 114.3,25.4 SR10.14
N$55
  Top 0.254: HSD$2.8 106.68,111.76 111.76,106.68 SR7.15
N$56
  Top 0.254: HSD$3.8 106.68,85.09 111.76,80.01 SR8.15
N$57
  Top 0.254: HSD$4.8 106.68,58.42 111.76,53.34 SR9.15
N$58
  Top 0.254: HSD$5.8 106.68,31.75 111.76,26.67 SR10.15
N$59
  Top 0.254: SR7.1 HSD$2.7
N$60
  Top 0.254: SR7.2 HSD$2.6
N$61
  Top 0.254: SR7.3 HSD$2.5
N$62
  Top 0.254: SR7.4 HSD$2.4
N$63
  Top 0.254: SR7.5 HSD$2.3
N$64
  Top 0.254: SR7.6 HSD$2.2
N$65
  Top 0.254: SR7.7 HSD$2.1
N$66
  Top 0.254: SR8.1 HSD$3.7
N$67
  Top 0.254: SR8.2 HSD$3.6
N$68
  Top 0.254: SR8.3 HSD$3.5
N$69
  Top 0.254: SR8.4 HSD$3.4
N$70
  Top 0.254: SR8.5 HSD$3.3
N$71
  Top 0.254: SR8.6 HSD$3.2
N$72
  Top 0.254: SR8.7 HSD$3.1
N$73
  Top 0.254: SR9.1 HSD$4.7
N$74
  Top 0.254: SR9.2 HSD$4.6
N$75
  Top 0.254: SR9.3 HSD$4.5
N$76
  Top 0.254: SR9.4 HSD$4.4
N$77
  Top 0.254: SR9.5 HSD$4.3
N$78
  Top 0.254: SR9.6 HSD$4.2
N$79
  Top 0.254: SR9.7 HSD$4.1
N$80
  Top 0.254: SR10.1 HSD$5.7
N$81
  Top 0.254: SR10.2 HSD$5.6
N$82
  Top 0.254: SR10.3 HSD$5.5
N$83
  Top 0.254: SR10.4 HSD$5.4
N$84
  Top 0.254: SR10.5 HSD$5.3
N$85
  Top 0.254: SR10.6 HSD$5.2
N$86
  Top 0.254: SR10.7 HSD$5.1
N$89
  Top 0.254: SR2.1 ULN2.8
N$90
  Top 0.254: SR3.1 ULN3.8
N$95
  Top 0.254: R2.2 66.04,11.43 68.58,13.97 RED_LED1.A
N$96
  Top 0.254: R1.2 77.47,11.43 80.01,13.97 RED_LED2.A
N$98
  Top 0.254: R3.2 52.07,11.43 54.61,13.97 GRN_LED.A
RH$1
  Bottom 0.254: HSD$2.16 87.63,99.06 85.09,96.52 X2.10
RH$2
  Top 0.254: HSD$3.16 90.17,71.12 81.28,71.12 73.66,63.5 X2.36
RH$3
  Top 0.254: X2.16 73.66,88.9 77.47,85.09 HSD$3.11
RH$4
  Top 0.254: HSD$3.15 80.01,74.93 73.66,68.58 X2.32
RH$5
  Top 0.254: HSD$3.12 74.93,82.55 73.66,83.82 X2.20
RH$6
  Top 0.254: HSD$3.14 77.47,77.47 73.66,73.66 X2.28
RH$7
  Top 0.254: X2.24 73.66,78.74 74.93,80.01 HSD$3.13
RL$1
  Bottom 0.254: ULN2.13 52.07,99.06 53.34,100.33 64.77,100.33 X2.6
RL$2
  Bottom 0.254: ULN3.13 54.61,72.39 59.69,67.31 64.77,67.31 X2.34
RL$3
  Bottom 0.254: ULN3.18 52.07,85.09 57.15,90.17 64.77,90.17 X2.14
RL$4
  Bottom 0.254: ULN3.14 55.88,74.93 58.42,72.39 64.77,72.39 X2.30
RL$5
  Bottom 0.254: ULN3.17 52.07,82.55 54.61,85.09 64.77,85.09 X2.18
RL$6
  Bottom 0.254: ULN3.15 64.77,77.47 X2.26
RL$7
  Bottom 0.254: ULN3.16 64.77,80.01 X2.22
SCONNECT$1  (via drill 0.55)
  Top 0.254: v119.38,144.78 119.38,13.97 114.3,8.89 17.78,8.89 13.97,12.7 13.97,19.05 15.24,20.32 17.78,20.32 20.32,22.86 20.32,30.48 19.05,31.75 SR5.9 | v115.57,144.78 114.3,143.51 114.3,132.08 SR6.14
  Bottom 0.254: v119.38,144.78 v115.57,144.78
VCC(5V)  (via drill 0.55)
  Top 0.254: v125.73,135.89 v125.73,120.65 v125.73,109.22 v125.73,93.98 v125.73,82.55 v125.73,67.31 v125.73,55.88 v125.73,40.64 v125.73,29.21 v125.73,13.97 125.73,10.16 119.38,3.81 v60.96,3.81 12.7,3.81 6.35,10.16 v6.35,13.97 v6.35,29.21 v6.35,40.64 v6.35,55.88 v6.35,67.31 v6.35,82.55 v6.35,93.98 v6.35,109.22 v6.35,120.65 v6.35,133.35 VCC(5V)-H.1
  Bottom 0.254: SR1.16 v6.35,120.65 | SR2.10 v6.35,109.22 | SR2.16 v6.35,93.98 | SR3.10 v6.35,82.55 | SR3.16 v6.35,67.31 | SR4.10 v6.35,55.88 | SR4.16 v6.35,40.64 | SR5.10 v6.35,29.21 | SR5.16 v6.35,13.97 | SR6.10 v125.73,120.65 | SR7.16 v125.73,109.22 | SR7.10 v125.73,93.98 | SR8.16 v125.73,82.55 | SR8.10 v125.73,67.31 | SR9.16 v125.73,55.88 | SR9.10 v125.73,40.64 | SR10.16 v125.73,29.21 | SR10.10 v125.73,13.97 | SR6.16 v125.73,135.89 | R2.1 62.23,19.05 60.96,17.78 v60.96,3.81 | SR1.10 12.7,135.89 10.16,133.35 v6.35,133.35

## Text on the board
tPlace: FlipDot Controller / Version 0.1 / Yaniv Alfasy | Inputs | Shift / Registers | Darlington / Arrays | Source / Drivers | Shift / Registers (2) | Dataline | Clearline | Clockline | Vcc(9v) | Vcc(5v) | Clockline | Vcc(9v) | Gnd(9v) | Gnd(9v) | Gnd(5v) | Clearline | Dataline | Vcc(5v) | Gnd(5v) | MIC2981YN (1) | SN74HC595 (1) | ULN2803 (1) | SN74HC595 (6) | C5 | C6 | C4 | C7 | C3 | RL1 | C2 | C8 | MIC2981YN (2) | SN74HC595 (2) | ULN2803 (2) | C1 | RH1 | C9 | SN74HC595 (7) | RL3 | C10 | RH3 | C11 | RL5 | C12 | RH5 | C13 | RL7 | C14 | RH7 | FipDot Board PinOut | C15 | RL6 | Vcc(9v) | Vcc(5v) | C16 | RH6 | Vcc(5v) | Vcc(9v) | C17 | RL4 | MIC2981YN (3) | Gnd(9v) | Gnd(5v) | SN74HC595 (3) | ULN2803 (3) | Clockline | Gnd(5v) | Gnd(9v) | Clearline | Clockline | Dataline | C18 | RH4 | Dataline | Clockline | Clearline | SN74HC595 (8) | C19 | RL2 | Clearline | C20 | RH2 | Dataline | C21 | C30 | C22 | C29 | C28 | C23 | C27 | C24 | C26 | C25 | MIC2981YN (4) | SN74HC595 (4) | ULN2803 (4) | SN74HC595 (9) | Status | MIC2981YN (5) | SN74HC595 (5) | ULN2803 (5) | Vcc(5v) | Gnd(5v) | 220Ω | Power | 220Ω | 440Ω | Dataline | Gnd(5v) | Vcc(5v) | Dataline | SN74HC595 (10) | Clockline | Vcc(9v) | Gnd(9v) | Clockline | Clearline | Clearline | Comm | 5V | 9V | Gnd(9v) | Vcc(9v)